# EAGLE board Wheelchair (EAGLE 5.04), part 1 of 2
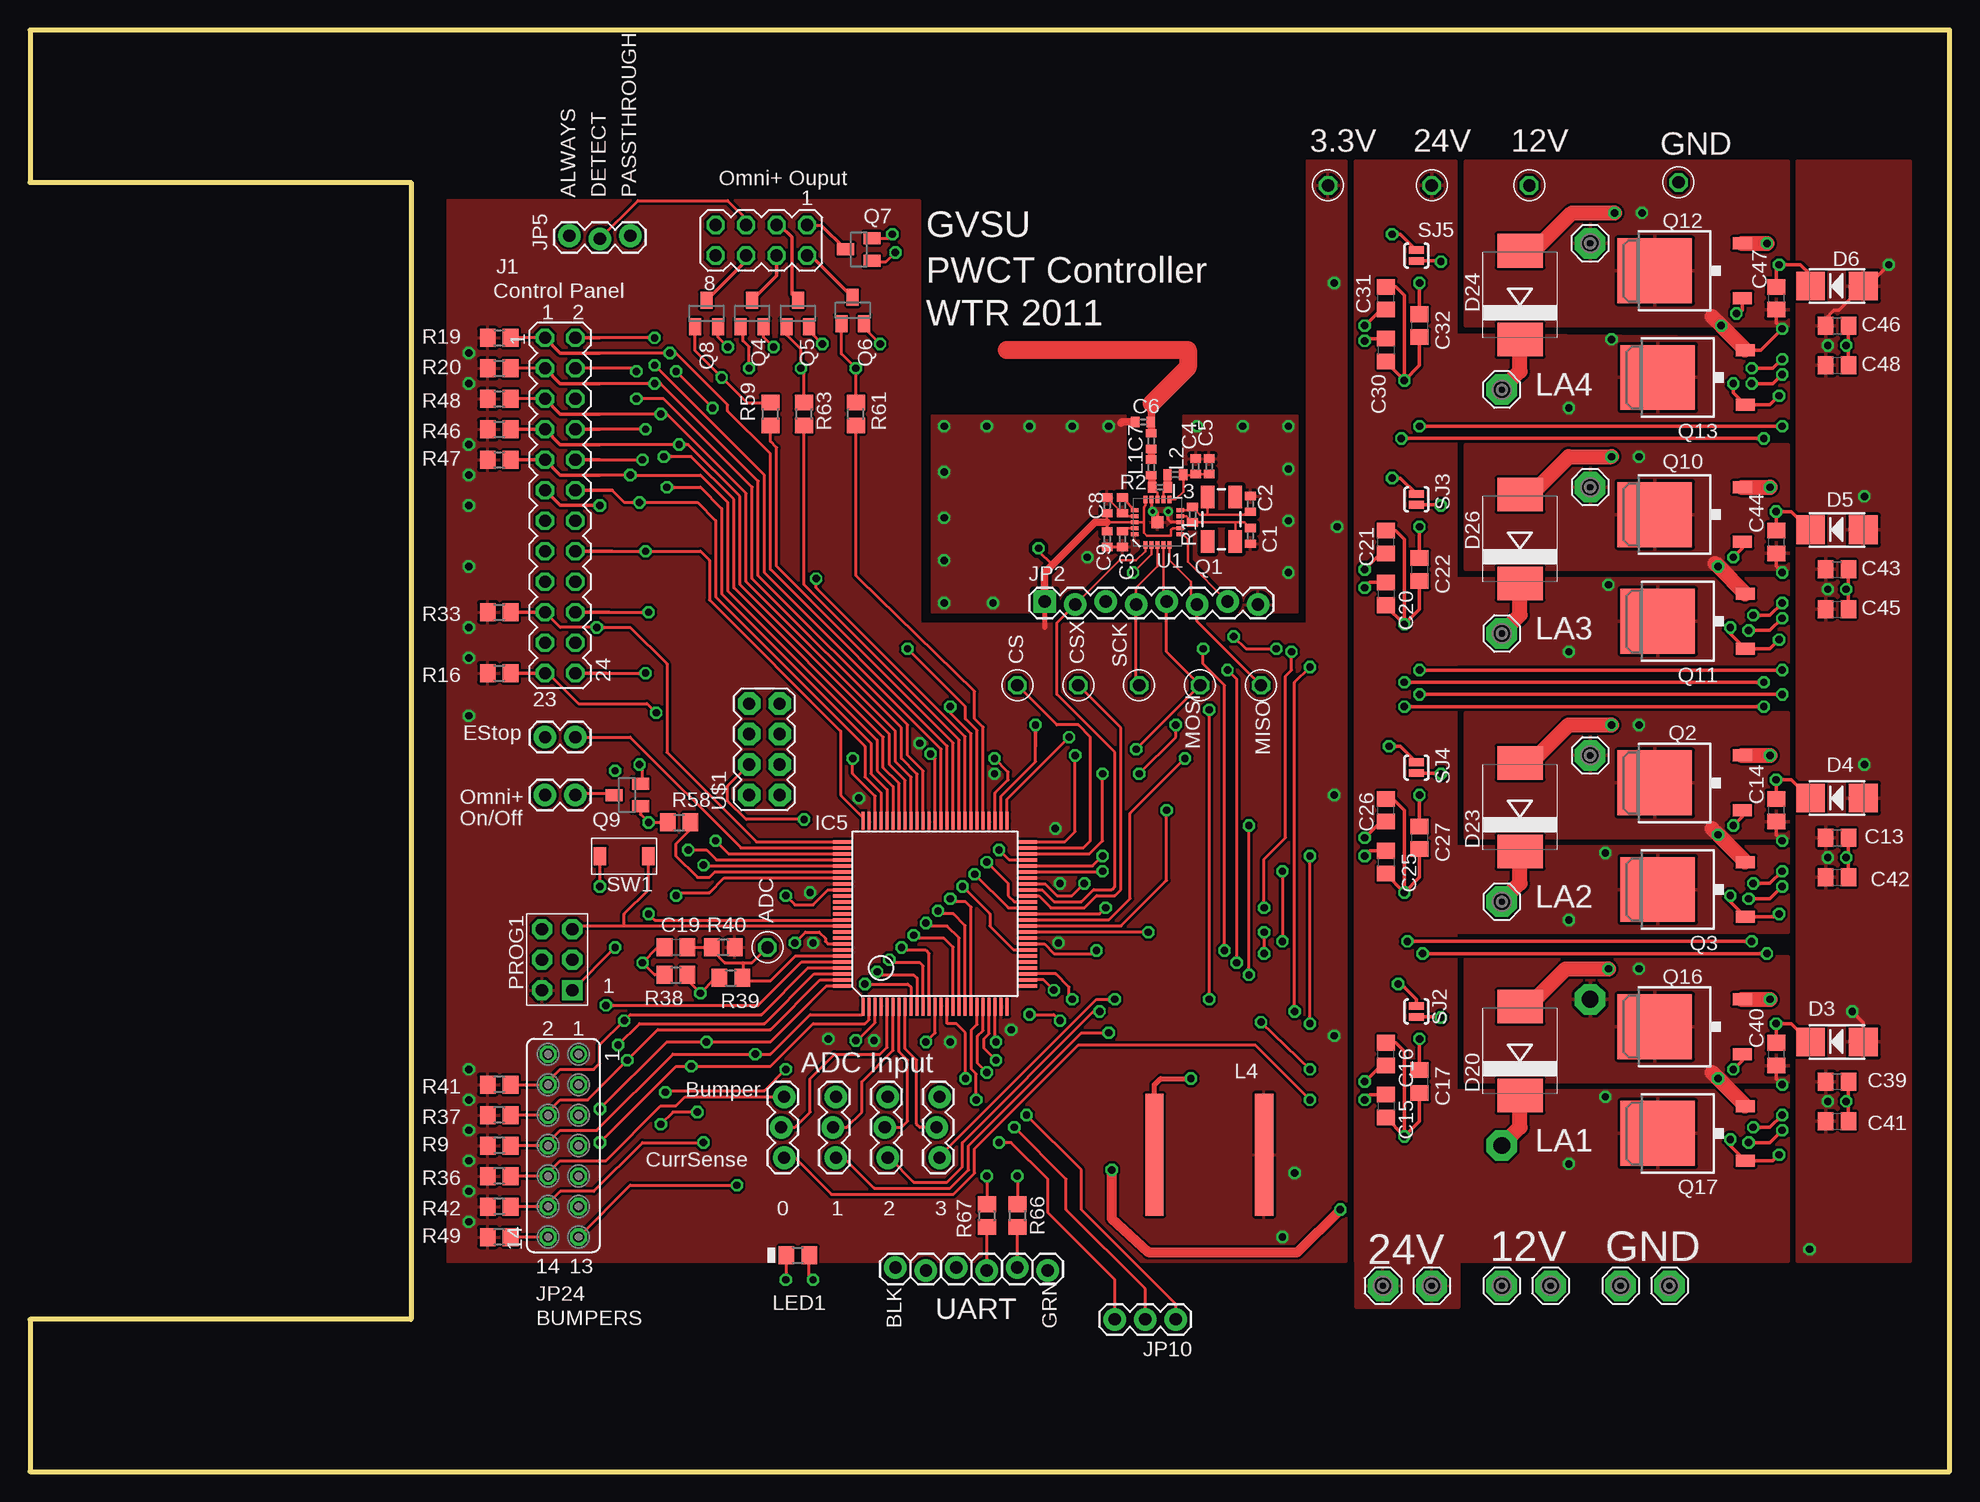
[diagram p0: board, top side]
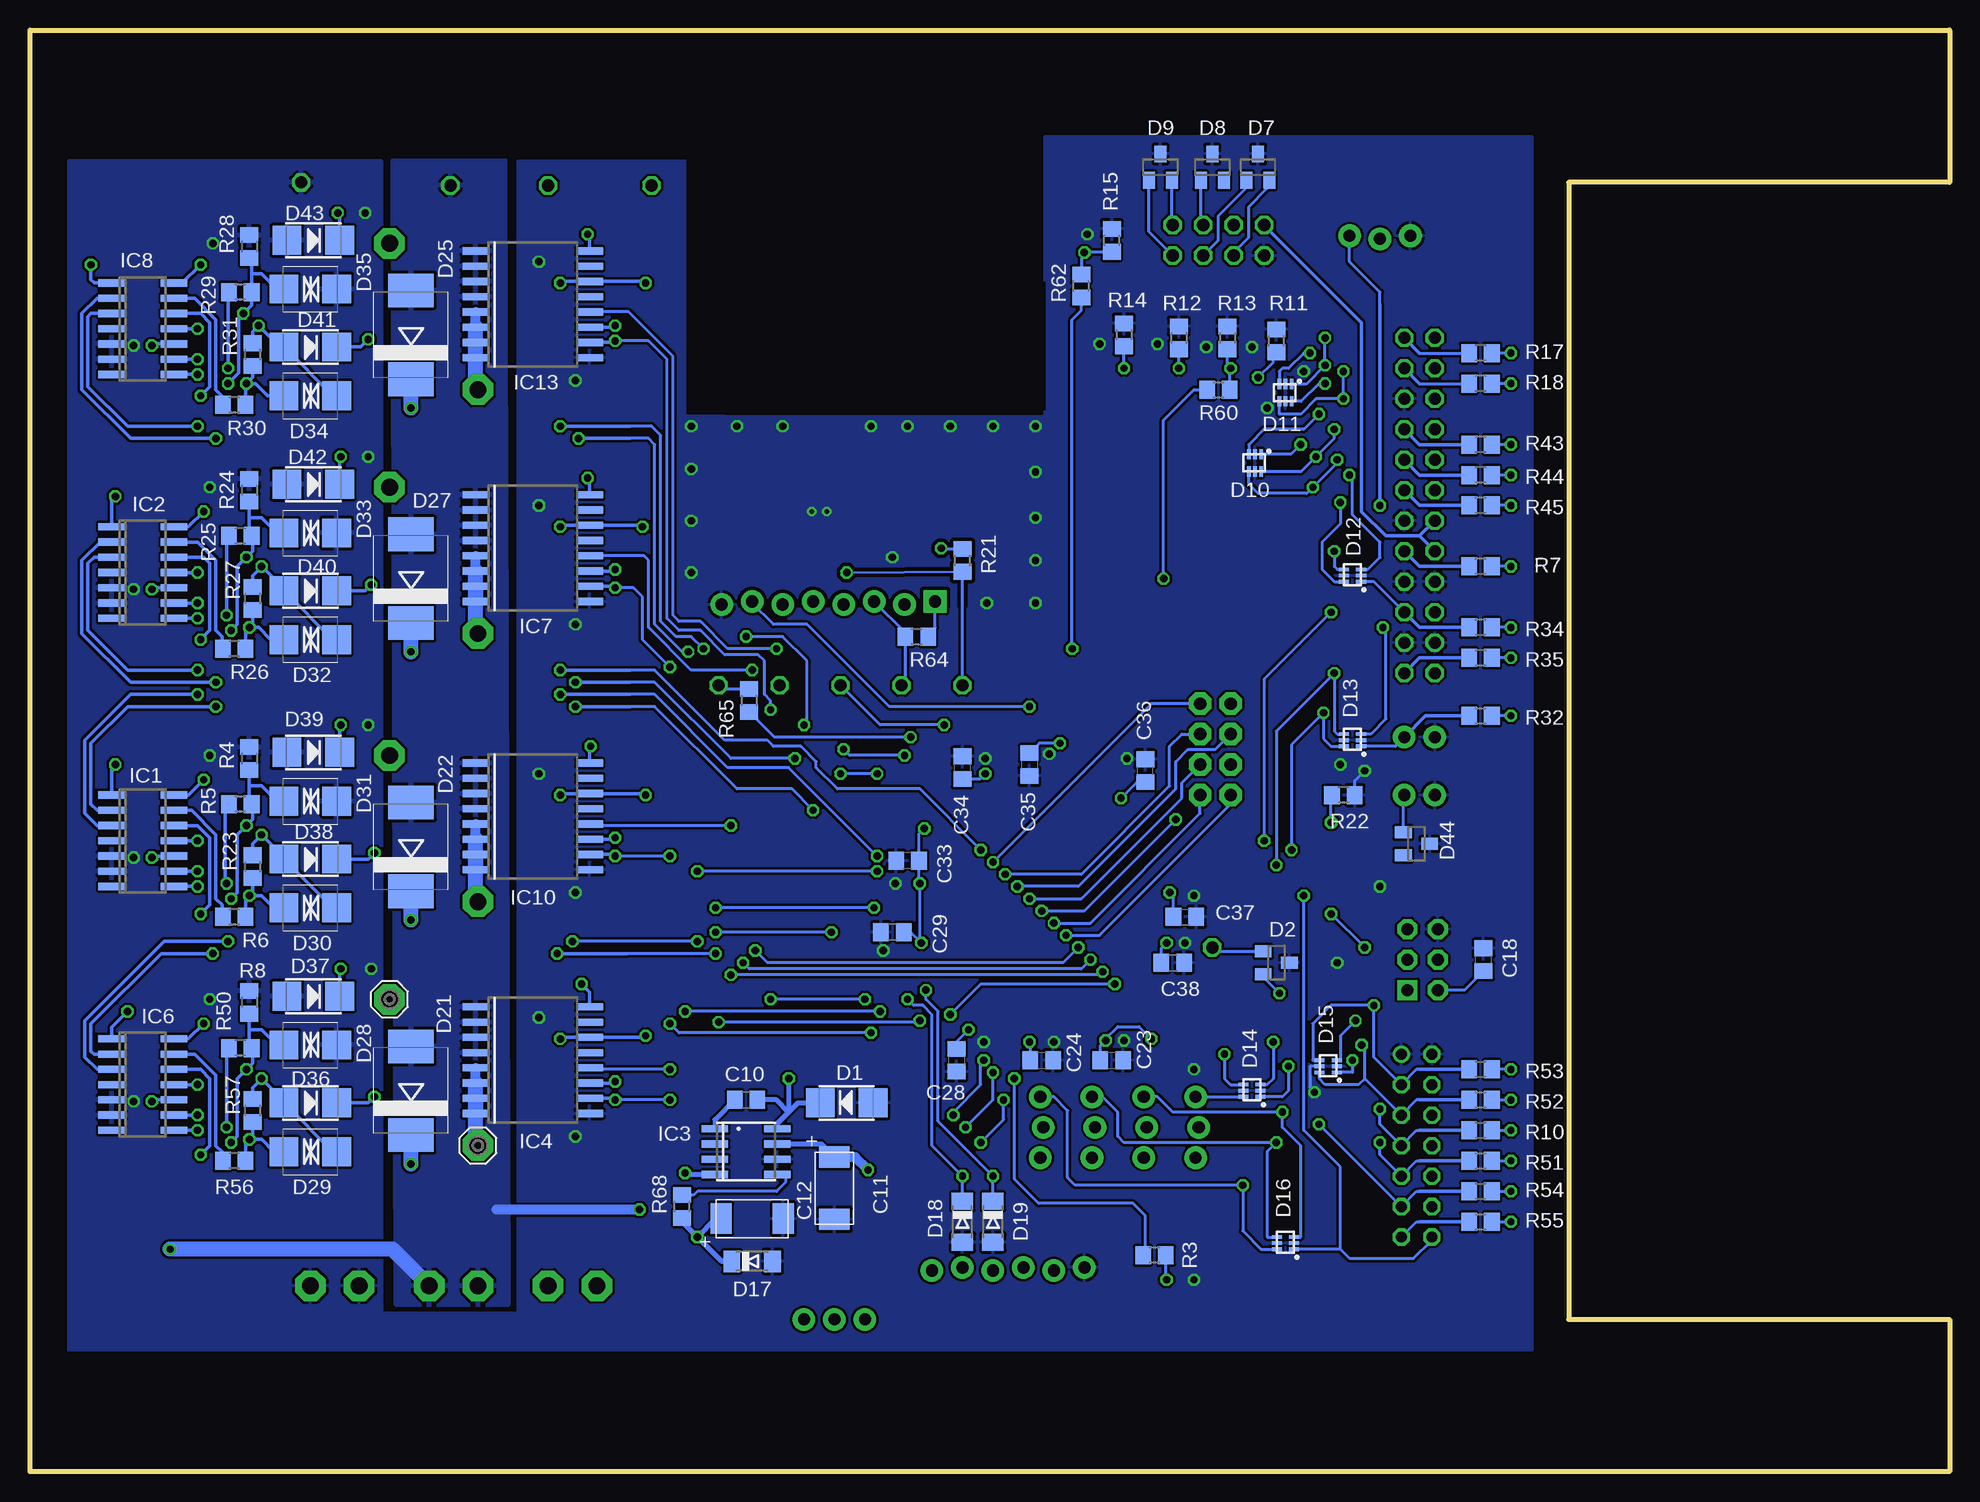
[diagram p1: board, bottom side, seen from below]

Size 160.02 x 120.14 mm. Coordinates in mm from the lower left corner, seen from the top.
Outline: 0,0 160.02,0 160.02,120.14 0,120.14 0,107.44 31.75,107.44 31.75,12.7 0,12.7 0,0
Copper layers (1*16): Top 0.035mm / dielectric 1.5mm / Bottom 0.035mm
Design rules "fab *": minimum track width 10mil, minimum drill 24mil, track to track 8mil, track to pad 8mil, pad to pad 8mil, via to via 8mil, smd to smd 8mil, copper to edge 20mil, drill to drill 8mil, minimum pad ring 10mil, minimum via ring 8mil, stop-mask expansion 0mil, vias tented up to drill 0mil, thermal gap 10mil
tRestrict: area 75.4,88.5 to 102.1,99.1
bRestrict: area 75.4,88.5 to 102.1,99.1

## Footprints (pad centres in the part's own frame; a part is rotated, then mirrored left to right if it is on the bottom)
C0402 = smd 0.7 x 0.9: 1 -0.65,0; 2 0.65,0
C0805 = smd 1.3 x 1.5: 1 -0.95,0; 2 0.95,0
CPOL2312 = smd 1.778 x 2.54: + -2.591,0; - 2.591,0
SMA = smd 2.4 x 2.4: A 2.2,0; C -2.2,0
SOT-23 = smd 1 x 1.4: 1 -0.95,-1.1; 2 0.95,-1.1; 3 0,1.1
SOT23 = smd 1 x 1.4: 1 -0.95,-1.1; 2 0.95,-1.1; 3 0,1.1
SC89 = smd 0.305 x 0.838: 1 -0.508,-0.724; 2 0,-0.724; 3 0.508,-0.724; 4 0.508,0.724; 5 0,0.724; 6 -0.508,0.724
MINIMELF = smd 1.4 x 1.8: A 1.7,0; C -1.7,0
SMC = smd 2.8 x 3.8: A 3.7,0; C -3.7,0
SMBBI = smd 2.4 x 2.4: A 2.2,0; K -2.2,0
SO14 = smd 0.6 x 2.2: 1 -3.81,-2.6; 2 -2.54,-2.6; 3 -1.27,-2.6; 4 0,-2.6; 5 1.27,-2.6; 6 2.54,-2.6; 7 3.81,-2.6; 8 3.81,2.6; 9 2.54,2.6; 10 1.27,2.6; 11 0,2.6; 12 -1.27,2.6; 13 -2.54,2.6; 14 -3.81,2.6
SOIC8_3.9MM = smd 0.6 x 2.2: 1 -1.905,-2.6; 2 -0.635,-2.6; 3 0.635,-2.6; 4 1.905,-2.6; 5 1.905,2.6; 6 0.635,2.6; 7 -0.635,2.6; 8 -1.905,2.6
SOIC16W = smd 0.6 x 2.2: 1 -4.445,-4.75; 2 -3.175,-4.75; 3 -1.905,-4.75; 4 -0.635,-4.75; 5 0.635,-4.75; 6 1.905,-4.75; 7 3.175,-4.75; 8 4.445,-4.75; 9 4.445,4.75; 10 3.175,4.75; 11 1.905,4.75; 12 0.635,4.75; 13 -0.635,4.75; 14 -1.905,4.75; 15 -3.175,4.75; 16 -4.445,4.75
TQFP100 = smd 0.27 x 1.5: 1 -6,-7.75; 2 -5.5,-7.75; 3 -5,-7.75; 4 -4.5,-7.75; 5 -4,-7.75; 6 -3.5,-7.75; 7 -3,-7.75; 8 -2.5,-7.75; 9 -2,-7.75; 10 -1.5,-7.75; 11 -1,-7.75; 12 -0.5,-7.75; 13 0,-7.75; 14 0.5,-7.75; 15 1,-7.75; 16 1.5,-7.75; 17 2,-7.75; 18 2.5,-7.75; 19 3,-7.75; 20 3.5,-7.75; 21 4,-7.75; 22 4.5,-7.75; 23 5,-7.75; 24 5.5,-7.75; 25 6,-7.75; 51 6,7.75; 52 5.5,7.75; 53 5,7.75; 54 4.5,7.75; 55 4,7.75; 56 3.5,7.75; 57 3,7.75; 58 2.5,7.75; 59 2,7.75; 60 1.5,7.75; 61 1,7.75; 62 0.5,7.75; 63 0,7.75; 64 -0.5,7.75; 65 -1,7.75; 66 -1.5,7.75; 67 -2,7.75; 68 -2.5,7.75; 69 -3,7.75; 70 -3.5,7.75; 71 -4,7.75; 72 -4.5,7.75; 73 -5,7.75; 74 -5.5,7.75; 75 -6,7.75 | smd 1.5 x 0.27: 26 7.75,-6; 27 7.75,-5.5; 28 7.75,-5; 29 7.75,-4.5; 30 7.75,-4; 31 7.75,-3.5; 32 7.75,-3; 33 7.75,-2.5; 34 7.75,-2; 35 7.75,-1.5; 36 7.75,-1; 37 7.75,-0.5; 38 7.75,0; 39 7.75,0.5; 40 7.75,1; 41 7.75,1.5; 42 7.75,2; 43 7.75,2.5; 44 7.75,3; 45 7.75,3.5; 46 7.75,4; 47 7.75,4.5; 48 7.75,5; 49 7.75,5.5; 50 7.75,6; 76 -7.75,6; 77 -7.75,5.5; 78 -7.75,5; 79 -7.75,4.5; 80 -7.75,4; 81 -7.75,3.5; 82 -7.75,3; 83 -7.75,2.5; 84 -7.75,2; 85 -7.75,1.5; 86 -7.75,1; 87 -7.75,0.5; 88 -7.75,0; 89 -7.75,-0.5; 90 -7.75,-1; 91 -7.75,-1.5; 92 -7.75,-2; 93 -7.75,-2.5; 94 -7.75,-3; 95 -7.75,-3.5; 96 -7.75,-4; 97 -7.75,-4.5; 98 -7.75,-5; 99 -7.75,-5.5; 100 -7.75,-6
1X06_LOCK = drill 1.016 pad 1.88 round: 1 0,0; 2 2.54,-0.254; 3 5.08,0; 4 7.62,-0.254; 5 10.16,0; 6 12.7,-0.254
1X08_LOCK = drill 1.016 pad 1.88 square: 1 0,0.127 | drill 1.016 pad 1.88 round: 2 2.54,-0.127; 3 5.08,0.127; 4 7.62,-0.127; 5 10.16,0.127; 6 12.7,-0.127; 7 15.24,0.127; 8 17.78,-0.127
1X02 = drill 1.016 pad 1.88 round: 1 0,0; 2 2.54,0
1X03_LOCK = drill 1.016 pad 1.88 round: 1 0,0.127; 2 2.54,-0.127; 3 5.08,0.127
1X03 = drill 1.016 pad 1.88 round: 1 0,0; 2 2.54,0; 3 5.08,0
LCI_SERIES_PULSE_EGR = smd 1.524 x 10.16: P$1 4.572,0; P$2 -4.572,0
D0805 = smd 1.3 x 1.5: A 0.95,0; C -0.95,0
SE14 = drill 1.397 pad 2.54 octagon: MP 0,0
CON6P2R = drill 1.016 pad 1.676 square: 1 -2.54,-1.27 | drill 1.016 pad 1.676 octagon: 2 -2.54,1.27; 3 0,-1.27; 4 0,1.27; 5 2.54,-1.27; 6 2.54,1.27
CRYSTAL-SMD-5X3 = smd 1.9 x 1.1: 1 -1.85,-1.15; 2 1.85,-1.15; 3 1.85,1.15; 4 -1.85,1.15
TO252 = smd 1 x 1.6: 1 -2.28,-4.8; 2 2.28,-4.8 | smd 5.4 x 6.2: 3 0,2.5
R0805 = smd 1.3 x 1.5: 1 -0.95,0; 2 0.95,0
SJ_2S-NO = smd 0.635 x 1.27: 1 -0.45,0; 2 0.45,0
MA12-2 = drill 1.016 octagon: 1 -13.97,-1.27; 2 -13.97,1.27; 3 -11.43,-1.27; 4 -11.43,1.27; 5 -8.89,-1.27; 6 -8.89,1.27; 7 -6.35,-1.27; 8 -6.35,1.27; 9 -3.81,-1.27; 10 -3.81,1.27; 11 -1.27,-1.27; 12 -1.27,1.27; 13 1.27,-1.27; 14 1.27,1.27; 15 3.81,-1.27; 16 3.81,1.27; 17 6.35,-1.27; 18 6.35,1.27; 19 8.89,-1.27; 20 8.89,1.27; 21 11.43,-1.27; 22 11.43,1.27; 23 13.97,-1.27; 24 13.97,1.27
MA04-2 = drill 1.016 octagon: 1 -3.81,-1.27; 2 -3.81,1.27; 3 -1.27,-1.27; 4 -1.27,1.27; 5 1.27,-1.27; 6 1.27,1.27; 7 3.81,-1.27; 8 3.81,1.27
FE07-2 = drill 0.914 round: 1 -7.62,1.27 | drill 0.914 octagon: 2 -7.62,-1.27; 3 -5.08,1.27; 4 -5.08,-1.27; 5 -2.54,1.27; 6 -2.54,-1.27; 7 0,1.27; 8 0,-1.27; 9 2.54,1.27; 10 2.54,-1.27; 11 5.08,1.27; 12 5.08,-1.27; 13 7.62,1.27; 14 7.62,-1.27
TL1015 = smd 1.05 x 1.5: P$1 2.025,0; P$2 -2.025,0
TP40MIL = drill 1.016 octagon: 1 0,0
QFN20 = smd 1 x 1: 0 0,0 | smd 0.65 x 0.3: 1 -1.9,1; 2 -1.9,0.5; 3 -1.9,0; 4 -1.9,-0.5; 5 -1.9,-1; 11 1.9,-1; 12 1.9,-0.5; 13 1.9,0; 14 1.9,0.5; 15 1.9,1 | smd 0.3 x 0.65: 6 -1,-1.9; 7 -0.5,-1.9; 8 0,-1.9; 9 0.5,-1.9; 10 1,-1.9; 16 1,1.9; 17 0.5,1.9; 18 0,1.9; 19 -0.5,1.9; 20 -1,1.9
2X4 = drill 1.016 pad 1.88 octagon: 1 -3.81,-1.27; 2 -3.81,1.27; 3 -1.27,-1.27; 4 -1.27,1.27; 5 1.27,-1.27; 6 1.27,1.27; 7 3.81,-1.27; 8 3.81,1.27

## Placement (x,y rotation side)
C1  22pF  [C0402]  101.73,77.98 270 top
C2  22pF  [C0402]  101.73,80.65 90 top
C3  33nF  [C0402]  91.06,77.72 270 top
C4  2.2nF  [C0402]  97.17,83.78 90 top
C5  4.7pF  [C0402]  98.29,83.78 90 top
C6  1.0pF  [C0402]  92.78,87.48 0 top
C7  1.5pF  [C0402]  93.46,85.89 90 top
C8  10nF  [C0402]  89.79,80.52 270 top
C9  1nF  [C0402]  89.79,77.72 90 top
C10  0.01uF  [C0805]  100.33,30.99 0 bottom
C11  100uF  [CPOL2312]  92.96,23.62 270 bottom
C12  100uF  [CPOL2312]  99.82,21.08 0 bottom
C13  10uF  [C0805]  150.62,52.83 0 top
C14  1uF  [C0805]  145.54,55.12 270 top
C15  1nF  [C0805]  113.03,30.48 270 top
C16  10nF  [C0805]  113.03,34.8 90 top
C17  0.1uF  [C0805]  115.82,32.51 270 top
C18  0.1uF  [C0805]  38.86,42.67 90 bottom
C19  0.1uF  [C0805]  53.85,43.69 180 top
C20  1nF  [C0805]  113.03,73.15 270 top
C21  10nF  [C0805]  113.03,77.47 90 top
C22  0.1uF  [C0805]  115.82,75.18 270 top
C23  0.1uF  [C0805]  69.85,34.29 0 bottom
C24  0.1uF  [C0805]  75.69,34.29 0 bottom
C25  1nF  [C0805]  113.03,50.8 270 top
C26  10nF  [C0805]  113.03,55.12 90 top
C27  0.1uF  [C0805]  115.82,52.83 270 top
C28  0.1uF  [C0805]  82.8,34.29 270 bottom
C29  0.1uF  [C0805]  88.14,44.96 180 bottom
C30  1nF  [C0805]  113.03,93.47 270 top
C31  10nF  [C0805]  113.03,97.79 90 top
C32  0.1uF  [C0805]  115.82,95.5 270 top
C33  0.1uF  [C0805]  86.87,50.93 180 bottom
C34  0.1uF  [C0805]  82.3,58.67 90 bottom
C35  0.1uF  [C0805]  76.71,58.93 270 bottom
C36  0.1uF  [C0805]  67.06,58.42 90 bottom
C37  0.1uF  [C0805]  63.75,46.23 0 bottom
C38  0.1uF  [C0805]  64.77,42.42 0 bottom
C39  10uF  [C0805]  150.62,32.51 0 top
C40  1uF  [C0805]  145.54,34.8 270 top
C41  0.1uF  [C0805]  150.62,29.21 0 top
C42  0.1uF  [C0805]  150.62,49.53 0 top
C43  10uF  [C0805]  150.62,75.18 0 top
C44  1uF  [C0805]  145.54,77.47 270 top
C45  0.1uF  [C0805]  150.62,71.88 0 top
C46  10uF  [C0805]  150.62,95.5 0 top
C47  1uF  [C0805]  145.54,97.79 270 top
C48  0.1uF  [C0805]  150.62,92.2 0 top
D1  [SMA]  91.95,30.73 0 bottom
D2  TL431SOT23  [SOT-23]  56.13,42.42 270 bottom
D3  [SMA]  150.62,35.81 0 top
D4  [SMA]  150.62,56.13 0 top
D5  [SMA]  150.62,78.49 0 top
D6  [SMA]  150.62,98.81 0 top
D7  ZENER_COMMON_ANODE  [SOT23]  57.66,108.71 0 bottom
D8  ZENER_COMMON_ANODE  [SOT23]  61.47,108.71 0 bottom
D9  ZENER_COMMON_ANODE  [SOT23]  65.79,108.71 0 bottom
D10  TVS4  [SC89]  57.91,84.07 180 bottom
D11  TVS4  [SC89]  55.37,89.92 180 bottom
D12  TVS4  [SC89]  49.78,74.68 90 bottom
D13  TVS4  [SC89]  49.78,60.96 90 bottom
D14  TVS4  [SC89]  58.17,31.75 90 bottom
D15  TVS4  [SC89]  51.82,33.78 90 bottom
D16  TVS4  [SC89]  55.37,19.05 90 bottom
D17  3.3V  [MINIMELF]  99.82,17.53 0 bottom
D18  3.3V  [MINIMELF]  82.3,20.83 270 bottom
D19  3.3V  [MINIMELF]  79.76,20.83 270 bottom
D20  [SMC]  124.21,35.05 90 top
D21  [SMC]  128.27,31.75 90 bottom
D22  [SMC]  128.27,52.07 90 bottom
D23  [SMC]  124.21,55.37 90 top
D24  [SMC]  124.21,98.04 90 top
D25  [SMC]  128.27,94.74 90 bottom
D26  [SMC]  124.21,77.72 90 top
D27  [SMC]  128.27,74.42 90 bottom
D28  [SMBBI]  136.65,35.56 0 bottom
D29  [SMBBI]  136.65,26.67 0 bottom
D30  [SMBBI]  136.65,46.99 0 bottom
D31  [SMBBI]  136.65,55.88 0 bottom
D32  [SMBBI]  136.65,69.34 0 bottom
D33  [SMBBI]  136.65,78.23 0 bottom
D34  [SMBBI]  136.65,89.66 0 bottom
D35  [SMBBI]  136.65,98.55 0 bottom
D36  TVSSMA  [SMA]  136.65,30.73 180 bottom
D37  TVSSMA  [SMA]  136.4,39.62 180 bottom
D38  TVSSMA  [SMA]  136.65,51.05 180 bottom
D39  TVSSMA  [SMA]  136.4,59.94 180 bottom
D40  TVSSMA  [SMA]  136.65,73.41 180 bottom
D41  TVSSMA  [SMA]  136.65,93.73 180 bottom
D42  TVSSMA  [SMA]  136.4,82.3 180 bottom
D43  TVSSMA  [SMA]  136.4,102.62 180 bottom
D44  ZENER_COMMON_ANODE  [SOT23]  44.45,52.32 270 bottom
IC1  LT1160  [SO14]  150.62,52.58 270 bottom
IC2  LT1160  [SO14]  150.62,74.93 270 bottom
IC3  LM2674M  [SOIC8_3.9MM]  100.33,26.67 270 bottom
IC4  ACS710  [SOIC16W]  118.11,34.29 270 bottom
IC5  ATXMEGA_A1  [TQFP100]  75.44,46.48 0 top
IC6  LT1160  [SO14]  150.62,32.26 270 bottom
IC7  ACS710  [SOIC16W]  118.11,76.96 270 bottom
IC8  LT1160  [SO14]  150.62,95.25 270 bottom
IC10  ACS710  [SOIC16W]  118.11,54.61 270 bottom
IC13  ACS710  [SOIC16W]  118.11,97.28 270 bottom
JP1  [1X06_LOCK]  72.14,17.02 0 top
JP2  [1X08_LOCK]  84.58,72.39 0 top
JP3  [1X02]  45.47,61.21 180 top
JP4  [1X02]  45.47,56.39 180 top
JP5  [1X03_LOCK]  44.96,102.87 0 top
JP6  [1X03_LOCK]  62.74,31.24 270 top
JP7  [1X03_LOCK]  67.06,31.24 270 top
JP8  [1X03_LOCK]  71.37,31.24 270 top
JP9  [1X03_LOCK]  75.69,31.24 270 top
JP10  [1X03]  95.5,12.7 180 top
L1  3.9nH  [C0402]  93.46,83.69 90 top
L2  2.7nH  [C0402]  95.46,83.09 180 top
L3  8.2nH  [C0402]  94.18,82.04 180 top
L4  118uH  [LCI_SERIES_PULSE_EGR]  98.3,26.42 180 top
LED1  blue  [D0805]  64.01,18.03 0 top
LSP1  SE14  [SE14]  122.68,15.49 0 top
LSP2  SE14  [SE14]  112.78,15.49 0 top
LSP3  SE14  [SE14]  122.68,27.18 180 bottom
LSP4  SE14  [SE14]  116.84,15.49 0 top
LSP5  SE14  [SE14]  126.75,15.49 0 top
LSP6  SE14  [SE14]  132.59,15.49 0 top
LSP7  SE14  [SE14]  130.05,39.37 180 bottom
LSP8  SE14  [SE14]  136.65,15.49 0 top
LSP17  SE14  [SE14]  122.68,69.85 0 top
LSP18  SE14  [SE14]  130.05,82.04 0 top
LSP19  SE14  [SE14]  122.68,47.5 0 top
LSP20  SE14  [SE14]  130.05,59.69 0 top
LSP21  SE14  [SE14]  122.68,90.17 270 top
LSP22  SE14  [SE14]  130.05,102.36 270 top
PROG1  AVR_ISP_PDI  [CON6P2R]  43.94,42.67 90 top
Q1  16MHz  [CRYSTAL-SMD-5X3]  99.31,79.38 90 top
Q2  MOSFET-NTO252  [TO252]  137.92,57.4 90 top
Q3  MOSFET-NTO252  [TO252]  138.18,48.51 90 top
Q4  MOSFET-N.SOT23  [SOT-23]  60.2,96.52 0 top
Q5  MOSFET-N.SOT23  [SOT-23]  64.01,96.52 0 top
Q6  MOSFET-N.SOT23  [SOT-23]  68.58,96.77 0 top
Q7  MOSFET-N.SOT23  [SOT-23]  69.09,101.85 90 top
Q8  MOSFET-N.SOT23  [SOT-23]  56.39,96.52 0 top
Q9  MOSFET-N.SOT23  [SOT-23]  49.78,56.39 90 top
Q10  MOSFET-NTO252  [TO252]  137.92,79.76 90 top
Q11  MOSFET-NTO252  [TO252]  138.18,70.87 90 top
Q12  MOSFET-NTO252  [TO252]  137.92,100.08 90 top
Q13  MOSFET-NTO252  [TO252]  138.18,91.19 90 top
Q16  MOSFET-NTO252  [TO252]  137.92,37.08 90 top
Q17  MOSFET-NTO252  [TO252]  138.18,28.19 90 top
R1  1M  [C0402]  96.9,79.76 90 top
R2  22K  [C0402]  91.06,80.52 270 top
R3  40  [R0805]  66.29,18.03 180 bottom
R4  10k  [R0805]  141.73,59.44 270 bottom
R5  15  [R0805]  142.49,55.63 180 bottom
R6  15  [R0805]  143,46.23 180 bottom
R7  10k  [R0805]  39.12,75.44 180 bottom
R8  10k  [R0805]  141.73,39.12 270 bottom
R9  10k  [R0805]  39.12,27.18 180 top
R10  10k  [R0805]  39.12,28.45 0 bottom
R11  10k  [R0805]  56.13,94.23 90 bottom
R12  10k  [R0805]  64.26,94.49 270 bottom
R13  10k  [R0805]  60.2,94.49 270 bottom
R14  10k  [R0805]  68.83,94.74 270 bottom
R15  10k  [R0805]  69.85,102.62 90 bottom
R16  145  [R0805]  39.12,66.55 0 top
R17  10k  [R0805]  39.12,93.22 180 bottom
R18  10k  [R0805]  39.12,90.68 180 bottom
R19  10k  [R0805]  39.12,94.49 0 top
R20  10k  [R0805]  39.12,91.95 0 top
R21  100k  [R0805]  82.3,75.95 90 bottom
R22  10k  [R0805]  50.55,56.39 180 bottom
R23  10k  [R0805]  141.48,50.42 270 bottom
R24  10k  [R0805]  141.73,81.79 270 bottom
R25  15  [R0805]  142.49,77.98 180 bottom
R26  15  [R0805]  143,68.58 180 bottom
R27  10k  [R0805]  141.48,72.77 270 bottom
R28  10k  [R0805]  141.73,102.11 270 bottom
R29  15  [R0805]  142.49,98.3 180 bottom
R30  15  [R0805]  143,88.9 180 bottom
R31  10k  [R0805]  141.48,93.09 270 bottom
R32  10k  [R0805]  39.12,62.99 0 bottom
R33  10k  [R0805]  39.12,71.63 0 top
R34  10k  [R0805]  39.12,70.36 180 bottom
R35  110  [R0805]  39.12,67.82 180 bottom
R36  10k  [R0805]  39.12,24.64 180 top
R37  10k  [R0805]  39.12,29.72 180 top
R38  12.5k  [R0805]  53.85,41.4 0 top
R39  1k  [R0805]  58.42,41.15 0 top
R40  400  [R0805]  57.79,43.69 180 top
R41  10k  [R0805]  39.12,32.26 180 top
R42  10k  [R0805]  39.12,22.1 180 top
R43  100k  [R0805]  39.12,85.6 180 bottom
R44  100k  [R0805]  39.12,83.06 180 bottom
R45  100k  [R0805]  39.12,80.52 180 bottom
R46  100k  [R0805]  39.12,86.87 0 top
R47  100k  [R0805]  39.12,84.33 0 top
R48  10k  [R0805]  39.12,89.41 0 top
R49  10k  [R0805]  39.12,19.56 180 top
R50  15  [R0805]  142.49,35.31 180 bottom
R51  10k  [R0805]  39.12,25.91 0 bottom
R52  10k  [R0805]  39.12,30.99 0 bottom
R53  10k  [R0805]  39.12,33.53 0 bottom
R54  10k  [R0805]  39.12,23.37 0 bottom
R55  10k  [R0805]  39.12,20.83 0 bottom
R56  15  [R0805]  143,25.91 180 bottom
R57  10k  [R0805]  141.48,30.1 270 bottom
R58  220  [R0805]  54.1,54.1 0 top
R59  220  [R0805]  61.72,88.14 90 top
R60  220  [R0805]  60.96,90.17 0 bottom
R61  220  [R0805]  68.83,88.14 90 top
R62  220  [R0805]  72.39,98.81 90 bottom
R63  220  [R0805]  64.52,88.14 90 top
R64  100k  [R0805]  86.11,69.6 0 bottom
R65  10k  [R0805]  100.08,64.26 270 bottom
R66  10k  [R0805]  82.3,21.34 270 top
R67  10k  [R0805]  79.76,21.34 270 top
R68  10k  [R0805]  105.66,22.1 90 bottom
SJ2  SOLDERJUMPERNO  [SJ_2S-NO]  115.57,38.35 270 top
SJ3  SOLDERJUMPERNO  [SJ_2S-NO]  115.57,81.03 270 top
SJ4  SOLDERJUMPERNO  [SJ_2S-NO]  115.57,58.67 270 top
SJ5  SOLDERJUMPERNO  [SJ_2S-NO]  115.57,101.35 270 top
SV1  [MA12-2]  44.2,80.52 270 top
SV2  [MA04-2]  60.96,102.62 180 top
SV4  [FE07-2]  44.45,27.18 270 top
SW1  [TL1015]  49.53,51.31 180 top
T1  [TP40MIL]  87.38,65.53 0 top
T2  [TP40MIL]  92.46,65.53 0 top
T3  [TP40MIL]  97.54,65.53 0 top
T4  [TP40MIL]  102.62,65.53 0 top
T5  [TP40MIL]  61.47,43.69 0 top
T6  [TP40MIL]  108.2,107.19 0 top
T7  [TP40MIL]  137.41,107.44 0 top
T8  [TP40MIL]  124.97,107.19 0 top
T9  [TP40MIL]  116.84,107.19 0 top
T10  [TP40MIL]  82.3,65.53 0 top
U1  NRF24L01SMD  [QFN20]  93.98,79.12 90 top
U$1  M04X2  [2X4]  61.21,60.2 90 top

## Library data of the parts
C1-C9 L1-L3 Q1 R1 R2 U1 = SparkFun
C10 C13-C48 R3-R68 = rcl
C11 C12 IC3 IC4 IC7 IC10 IC13 L4 LED1 = Jeff
D1-D6 D17-D43 Q2-Q13 Q16 Q17 T1-T10 = ads4
D7-D16 D44 IC1 IC2 IC5 IC6 IC8 PROG1 = vanossj
JP1-JP10 SJ2-SJ5 U$1 = SparkFun110309
LSP1-LSP8 LSP17-LSP22 = solpad
SV1 SV2 = con-lstb
SV4 = con-lsta
SW1 = Mouse Power

## Nets
+3V3: C8.2 C9.2 C12.+ C17.1 C18.1 C22.1 C23.1 C24.1 C27.1 C28.1 C29.1 C32.1 C33.1 C34.1 C35.1 C36.1 C37.1 C38.1 D17.C IC3.4 IC4.14 IC5.4 IC5.14 IC5.24 IC5.34 IC5.44 IC5.54 IC5.64 IC5.74 IC5.83 IC5.94 IC7.14 IC10.14 IC13.14 JP2.1 L4.P$2 PROG1.2 R7.1 R9.2 R10.2 R16.1 R17.1 R18.1 R19.1 R20.1 R21.2 R32.2 R33.1 R34.1 R35.1 R36.2 R37.2 R40.1 R41.2 R42.2 R43.1 R44.1 R45.1 R46.1 R47.1 R48.1 R49.2 R51.2 R52.2 R53.2 R54.2 R55.2 R64.2 R68.1 T6.1 U1.7 U1.15 U1.18
+12V: C11.+ C13.1 C39.1 C41.1 C42.1 C43.1 C45.1 C46.1 C48.1 D3.A D4.A D5.A D6.A D21.A D22.A D25.A D27.A IC1.1 IC1.10 IC2.1 IC2.10 IC3.7 IC4.1 IC4.2 IC4.3 IC4.4 IC6.1 IC6.10 IC7.1 IC7.2 IC7.3 IC7.4 IC8.1 IC8.10 IC10.1 IC10.2 IC10.3 IC10.4 IC13.1 IC13.2 IC13.3 IC13.4 LSP1.MP LSP5.MP T8.1
+24V: D21.C D22.C D25.C D27.C D36.C D38.C D40.C D41.C LSP2.MP LSP4.MP Q3.3 Q11.3 Q13.3 Q17.3 T9.1
ACTUATOR_DOWN: D12.1 IC5.78 R34.2 SV1.20
ACTUATOR_FORWARD1: IC5.35 IC6.2
ACTUATOR_FORWARD2: IC1.2 IC5.36
ACTUATOR_FORWARD3: IC2.2 IC5.37
ACTUATOR_FORWARD4: IC5.38 IC8.2
ACTUATOR_LED: D13.4 IC5.80 R35.2 SV1.24
ACTUATOR_REVERSE1: IC5.45 IC6.3
ACTUATOR_REVERSE2: IC1.3 IC5.46
ACTUATOR_REVERSE3: IC2.3 IC5.47
ACTUATOR_REVERSE4: IC5.48 IC8.3
ACTUATOR_UP: D12.4 IC5.75 R7.2 SV1.16
ANT: C6.2 C7.2
AREF: C19.1 D2.1 IC5.95 R39.2 R40.2 T5.1
BB_FIFTH: D10.3 IC5.67 R48.2 SV1.5
BB_FORWARD: D11.3 IC5.61 R19.2 SV1.1
BB_LEFT: D11.6 IC5.65 R20.2 SV1.3
BB_REVERSE: D11.1 IC5.62 R17.2 SV1.2
BB_RIGHT: D11.4 IC5.66 R18.2 SV1.4
BUMPER1: D15.4 IC5.96 R53.1 SV4.3
BUMPER2: D15.3 IC5.97 R41.1 SV4.4
BUMPER3: D15.6 IC5.98 R52.1 SV4.5
BUMPER4: D15.1 IC5.99 R37.1 SV4.6
BUMPER5: D14.3 IC5.100 R10.1 SV4.7
BUMPER6: D14.4 IC5.1 R9.1 SV4.8
BUMPER7: D14.1 IC5.2 R51.1 SV4.9
BUMPER8: D14.6 JP6.1 R36.1 SV4.10
BUMPER9: D16.3 JP7.1 R54.1 SV4.11
BUMPER10: D16.4 JP8.1 R42.1 SV4.12
BUMPER11: D16.6 JP9.1 R55.1 SV4.13
BUMPER_OVERRIDE: D13.3 IC5.76 R33.2 SV1.19
BUMPER_OVERRIDE_LED: D13.6 IC5.79 R16.2 SV1.23
CE: IC5.42 JP2.2 U1.1
CS: IC5.49 R21.1 T10.1 U1.2
CS_EXTERN: IC5.41 JP2.3 R64.1 T1.1
DETECT_OUT: JP5.2 SV2.5
DETECT_SIN: JP5.3 SV1.11
ESTOP: D13.1 IC5.77 JP3.1 R32.1
FIFTH_OUT: IC5.60 R59.1
FIFTH_SIN: D12.6 IC5.72 R45.2 SV1.12
FORWARD_OUT: IC5.56 R62.1
FORWARD_SIN: D10.1 IC5.68 R46.2 SV1.7
GND: C1.2 C2.2 C3.2 C4.2 C5.2 C6.1 C8.1 C9.1 C11.- C12.- C13.2 C15.2 C16.2 C17.2 C18.2 C19.2 C20.2 C21.2 C22.2 C23.2 C24.2 C25.2 C26.2 C27.2 C28.2 C29.2 C30.2 C31.2 C32.2 C33.2 C34.2 C35.2 C36.2 C37.2 C38.2 C39.2 C41.2 C42.2 C43.2 C45.2 C46.2 C48.2 D1.A D2.3 D7.3 D8.3 D9.3 D10.2 D10.5 D11.2 D11.5 D12.2 D12.5 D13.2 D13.5 D14.2 D14.5 D15.2 D15.5 D16.2 D16.5 D17.A D18.A D19.A D20.A D23.A D24.A D26.A D28.A D31.A D33.A D35.A D37.A D39.A D42.A D43.A D44.3 IC1.5 IC1.6 IC2.5 IC2.6 IC3.6 IC4.9 IC5.3 IC5.13 IC5.23 IC5.33 IC5.43 IC5.53 IC5.63 IC5.73 IC5.84 IC5.93 IC6.5 IC6.6 IC7.9 IC8.5 IC8.6 IC10.9 IC13.9 JP1.1 JP2.8 JP3.2 JP4.2 JP5.1 LED1.C LSP6.MP LSP8.MP PROG1.6 Q2.2 Q4.2 Q5.2 Q6.2 Q7.2 Q8.2 Q9.2 Q10.2 Q12.2 Q16.2 R2.2 R4.1 R8.1 R11.2 R12.1 R13.1 R14.1 R15.2 R22.1 R24.1 R28.1 R38.1 SJ2.2 SJ3.2 SJ4.2 SJ5.2 SV1.6 SV1.14 SV1.17 SV1.18 SV1.21 SV1.22 SV2.8 SV4.1 SV4.2 SW1.P$1 T7.1 U1.0 U1.8 U1.14 U1.17 U1.20
IRQ: IC5.57 JP2.7 U1.6
LA1: C40.2 D29.A D36.A D37.C IC6.11 LSP7.MP Q16.3 Q17.2 R57.1
LA1_CURR: IC4.12 IC5.9
LA1_ZCURR: C15.1 IC4.10 JP6.3
LA2: C14.2 D30.A D38.A D39.C IC1.11 LSP20.MP Q2.3 Q3.2 R23.1
LA2_CURR: IC5.10 IC10.12
LA2_ZCURR: C25.1 IC10.10 JP7.3
LA3: C44.2 D32.A D40.A D42.C IC2.11 LSP18.MP Q10.3 Q11.2 R27.1
LA3_CURR: IC5.11 IC7.12
LA3_ZCURR: C20.1 IC7.10 JP8.3
LA4: C47.2 D34.A D41.A D43.C IC8.11 LSP22.MP Q12.3 Q13.2 R31.1
LA4_CURR: IC5.12 IC13.12
LA4_ZCURR: C30.1 IC13.10 JP9.3
LEFT_OUT: IC5.59 R63.1
LEFT_SIN: D12.3 IC5.70 R47.2 SV1.9
LIMIT_SWITCH: D16.1 IC5.82 R49.1 SV4.14
MISO: JP2.6 R65.1 T4.1 U1.5
MOSI: IC5.50 JP2.5 T3.1 U1.4
N$1: C1.1 Q1.1 R1.1 U1.9
N$2: C2.1 Q1.3 R1.2 U1.10
N$3: L2.2 L3.1 U1.12
N$4: R2.1 U1.16
N$5: C3.1 U1.19
N$6: L1.1 L3.2 U1.13
N$7: C4.1 C5.1 L2.1 U1.11
N$8: LED1.A R3.1
N$9: C7.1 L1.2
N$10: C14.1 D4.C IC1.14
N$11: JP1.5 R66.2
N$12: D44.1 JP4.1 Q9.3
N$13: IC1.9 R5.2
N$14: D7.2 Q8.3 SV2.6
N$15: D7.1 Q4.3 SV2.4
N$16: D29.K IC6.12 Q17.1 R56.1 R57.2
N$17: D8.1 Q5.3 SV2.3
N$18: C10.2 D1.C IC3.8 L4.P$1
N$19: C10.1 IC3.1
N$20: D9.1 Q6.3 SV2.2
N$21: D9.2 Q7.3 SV2.1
N$22: D20.C IC4.5 IC4.6 IC4.7 IC4.8 LSP3.MP
N$23: C16.1 IC4.11
N$24: IC4.16 SJ2.1
N$25: D31.K IC1.8 Q2.1 R4.2 R5.1
N$26: D2.2 R38.2 R39.1
N$27: D30.K IC1.12 Q3.1 R6.1 R23.2
N$28: IC1.13 R6.2
N$29: D26.C IC7.5 IC7.6 IC7.7 IC7.8 LSP17.MP
N$30: C21.1 IC7.11
N$31: IC7.16 SJ3.1
N$32: C44.1 D5.C IC2.14
N$33: C40.1 D3.C IC6.14
N$34: JP1.4 R67.2
N$35: IC2.9 R25.2
N$36: D23.C IC10.5 IC10.6 IC10.7 IC10.8 LSP19.MP
N$37: C26.1 IC10.11
N$38: IC10.16 SJ4.1
N$39: D33.K IC2.8 Q10.1 R24.2 R25.1
N$41: D32.K IC2.12 Q11.1 R26.1 R27.2
N$42: IC2.13 R26.2
N$43: D24.C IC13.5 IC13.6 IC13.7 IC13.8 LSP21.MP
N$44: C31.1 IC13.11
N$45: IC13.16 SJ5.1
N$46: IC5.89 PROG1.1
N$47: IC5.90 PROG1.5 SW1.P$2
N$48: IC5.15 R3.2
N$49: IC3.5 R68.2
N$52: IC6.9 R50.2
N$54: D28.K IC6.8 Q16.1 R8.2 R50.1
N$55: IC6.13 R56.2
N$56: C47.1 D6.C IC8.14
N$58: IC8.9 R29.2
N$59: D35.K IC8.8 Q12.1 R28.2 R29.1
N$60: D34.K IC8.12 Q13.1 R30.1 R31.2
N$61: IC8.13 R30.2
N$62: Q9.1 R22.2 R58.1
N$63: Q8.1 R11.1 R59.2
N$64: Q4.1 R13.2 R60.2
N$65: Q6.1 R14.2 R61.2
N$66: Q7.1 R15.1 R62.2
N$67: Q5.1 R12.2 R63.2
N$68: IC5.51 R65.2
OMNI_ON_OFF: IC5.81 R58.2
PB0: IC5.5 JP6.2
PB1: IC5.6 JP7.2
PB2: IC5.7 JP8.2
PB3: IC5.8 JP9.2
PC1: IC5.16 U$1.2
PC2: IC5.17 U$1.1
PC3: IC5.18 U$1.4
PC4: IC5.19 U$1.3
PC5: IC5.20 JP10.3
PC6: IC5.21 JP10.2
PC7: IC5.22 JP10.1
PD0: IC5.25
PD1: IC5.26
PD4: IC5.29
PD5: IC5.30
PD6: IC5.31
PD7: IC5.32 U$1.6
PE4: IC5.39 U$1.5
PE5: IC5.40 U$1.7
PQ0: IC5.85
PQ1: IC5.86
PQ2: IC5.87
PQ3: IC5.88
REVERSE_OUT: IC5.55 R61.1
REVERSE_SIN: D10.6 IC5.69 R43.2 SV1.8
RIGHT_OUT: IC5.58 R60.1
RIGHT_SIN: D10.4 IC5.71 R44.2 SV1.10
RX: D19.C IC5.27 R67.1
SCK: IC5.52 JP2.4 T2.1 U1.3
TX: D18.C IC5.28 R66.1
VCC: SV1.13 SV1.15 SV2.7